# Altium PCB 海关全向控制器图传转接板.PcbDoc
Units mil, origin at the board's own origin, x right, y up, seen from the top; angles counter-clockwise.
Board outline 984.25 x 2362.2 mil, 2 copper layers (Top Layer, Bottom Layer), stack 65.792 mil thick; 11 components, 11 nets, 56 pads, 3 vias.
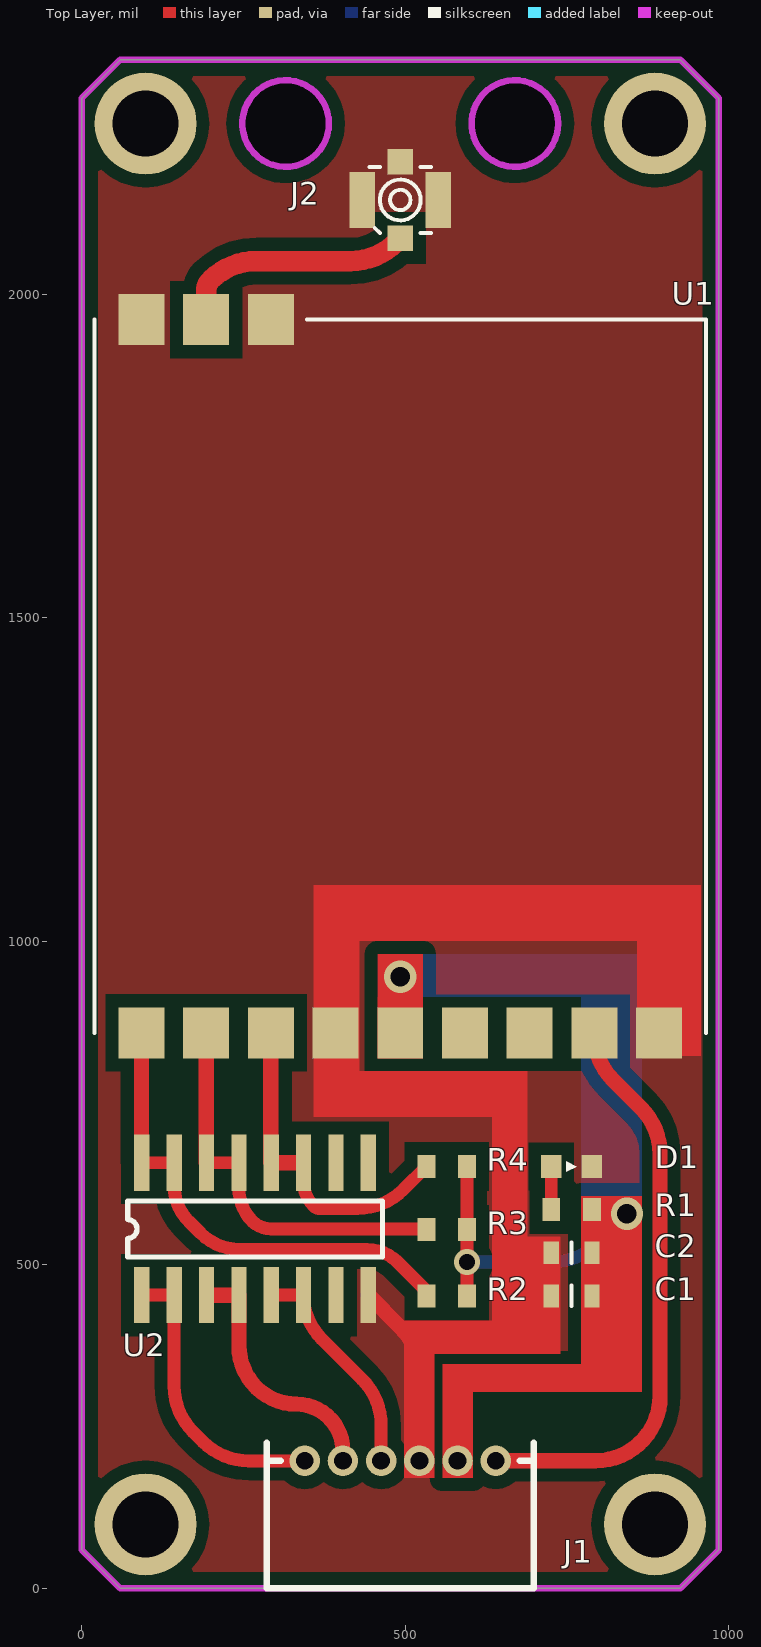
[diagram p0: Top Layer view]
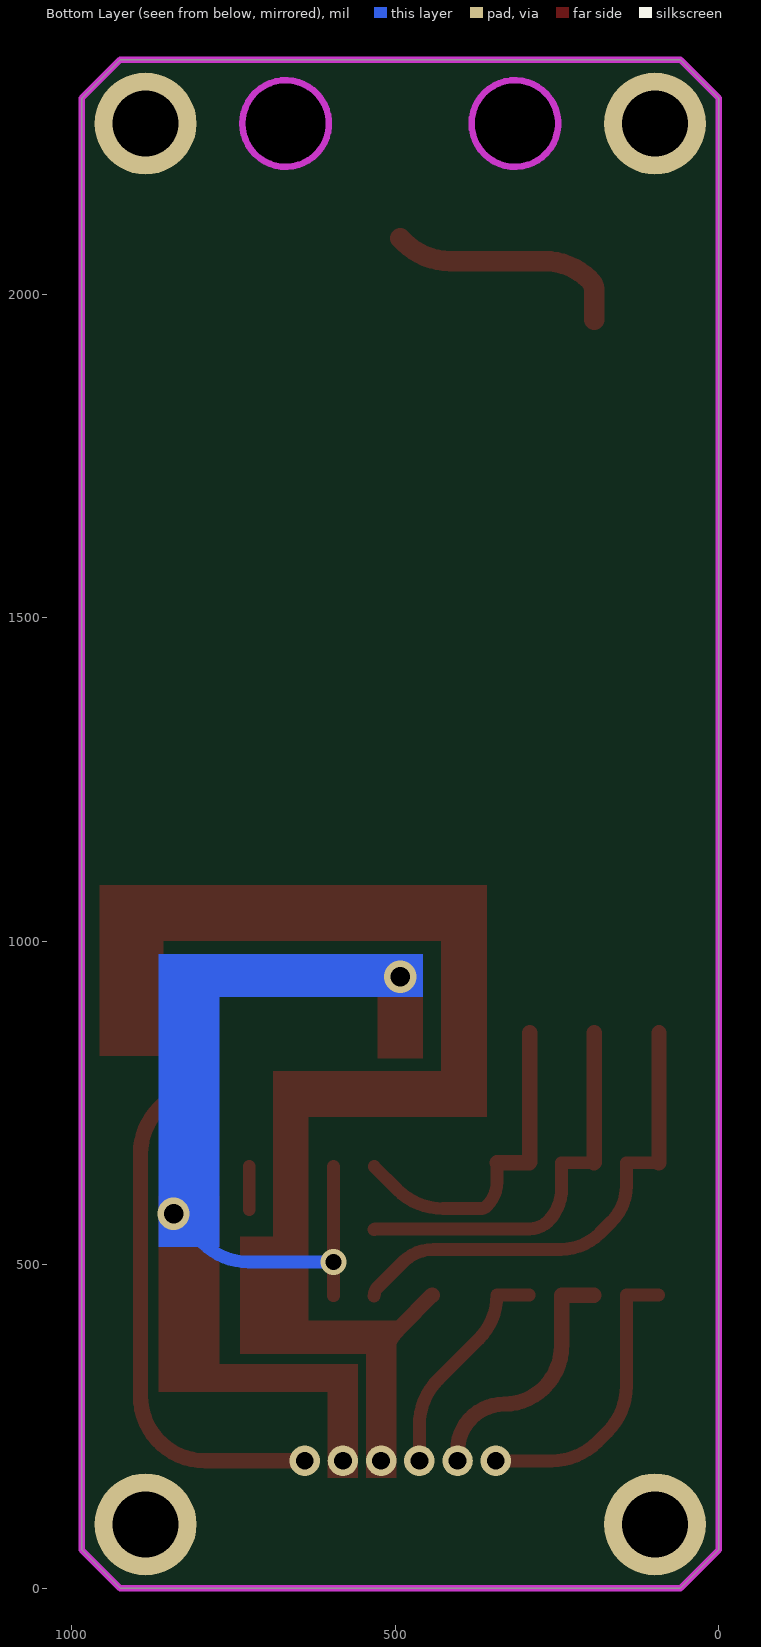
[diagram p1: Bottom Layer view, seen from below]
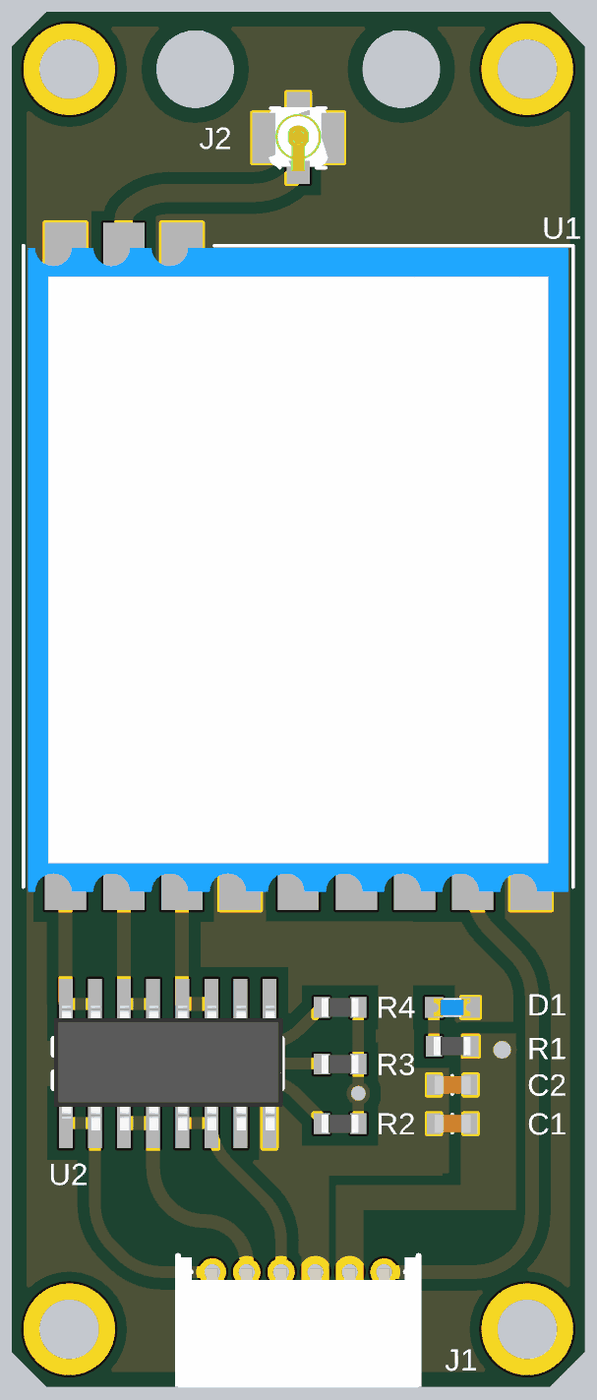
[diagram p2: 3D render of the assembled board from above, using the file's embedded part models]

## Layer stack, top to bottom
Top Solder: solder mask 0.4, Solder Resist, Dk 3.5
Top Layer: signal copper 1.4
Dielectric 1: dielectric 62.9921, FR-4, Dk 4.8
Bottom Layer: signal copper 1.4
Bottom Solder: solder mask 0.4, Solder Resist, Dk 3.5

## Board outline
0,59.05 59.05,0 925.2,0 984.25,59.06 984.25,2303.15 925.2,2362.21 59.06,2362.21 0,2303.15
cut-out: 314.96,2196.85 cw(c314.96,2263.78) 248.03,2263.78 cw(c314.96,2263.78) 314.96,2330.71 cw(c314.96,2263.78) 381.89,2263.78 cw(c314.96,2263.78)
cut-out: 669.29,2196.85 cw(c669.29,2263.78) 602.36,2263.78 cw(c669.29,2263.78) 669.29,2330.71 cw(c669.29,2263.78) 736.22,2263.78 cw(c669.29,2263.78)

## Design rules (kind name [scope] priority, off if disabled: settings)
Clearance [All] p1: gap=6
ComponentClearance [All] p1: gap=0 collisioncheckmode=3 verticalgap=0 showdistances=FALSE
Height [All] p1: minheight=0 maxheight=2000 prefheight=500
HoleSize [All] p1: absolutevalues=TRUE maxlimit=200 minlimit=1 maxpercent=80.000 minpercent=20.000
HoleToHoleClearance [All] p1: gap=6 allowstackedmicrovias=TRUE
MinimumSolderMaskSliver [All] p1: minsoldermaskwidth=0
PlaneConnect [All] p1: planeconnectstyle=Direct reliefexpansion=20 reliefentries=4 reliefconductorwidth=10 reliefairgap=10
PolygonConnect [All] p1: connectstyle=Direct reliefconductorwidth=10 reliefentries=4 polygonreliefangle="90 Angle" airgapwidth=10
RoutingVias [All] p1: holewidth=28 width=50 viastyle="Through Hole" minholewidth=8 minwidth=12 maxholewidth=200 maxwidth=300
SilkToSilkClearance [All] p1: silktosilkclearance=0
SilkToSolderMaskClearance [IsPad] p1: minsilkscreentomaskgap=0 clearancetoexposedcopper=TRUE
SolderMaskExpansion [All] p1: expansion=4
Width [All] p1: maxlimit=157.48 minlimit=10 preferedwidth=10
21 further rules are at their usual default settings.

## Components (designator, comment, footprint, x,y, rotation, side; value= is the part's Value field where it differs from the comment)
C1 "10uF" C0603 756.89,451.77 r0 top
C2 "0.1uF" C0603 756.89,518.37 r0 top
D1 "LED" LED0603 756.89,651.57 r0 top
J1 "Jack 1x6" ZH-6AWD 492.13,196.85 r0 top locked
J2 "ANT-ipex" IPEX 492.13,2145.67 r0 top
R1 "1K" R0603 756.89,584.97 r180 top
R2 "NC" R0603 563.98,451.77 r0 top
R3 "NC" R0603 563.98,554.13 r0 top
R4 "NC" R0603 563.98,651.57 r0 top
U1 "RX5808" RX5808 492.13,1409.45 r270 top
U2 "ULN2003" SO16 267.72,555.12 r90 top

## Footprints (in the part's own frame and the unit in brackets; to place one, negate y for a bottom-side part, rotate by r counter-clockwise, add the part's x,y. Pads: shape width x height; smd on the part's side, far side on the other; paste and mask are expansions set on the pad)
C0603 [mm]
  rect 0.6x0.9 smd: 1(-0.8,0) 2(0.8,0)
  silkscreen extent 0,-0.4 0,0.4, body extent -0.8,-0.4 0.8,0.4, height 0.5
IPEX [mm]
  rect 1x1 smd: 1(0,-1.5) 2(0,1.5)
  rect 1x2.2 smd: 2(-1.5,0) 2(1.5,0)
  silkscreen extent -1.2,-1.3 1.2,1.3, body extent -1.45,-1.45 1.45,1.45, height 0.9
LED0603 [mm]
  rect 0.8x0.9 smd: 1(-0.8,0) 2(0.8,0)
  silkscreen extent -0.2,-0.2 0.2,0.2, body extent -0.8,-0.4 0.8,0.4, height 0.6
R0603 [mm]
  rect 0.7x0.9 smd: 1(-0.8,0) 2(0.8,0)
  body extent -0.8,-0.4 0.8,0.4, height 0.37
RX5808 [mm]
  rect 2x1.8 smd: 1(-14,-10.16) 2(-14,-7.62) 3(-14,-5.08) 4(14,-10.16) 5(14,-7.62) 6(14,-5.08) 7(14,-2.54) 8(14,0) 9(14,2.54) 10(14,5.08) 11(14,7.62) 12(14,10.16)
  silkscreen extent -14,-12 14,12, body extent -13.91,-11.79 14.2,11.79, height 3
SO16 [mm]
  rect 2.2x0.6 smd: 1(-2.6,4.445) 2(-2.6,3.175) 3(-2.6,1.905) 4(-2.6,0.635) 5(-2.6,-0.635) 6(-2.6,-1.905) 7(-2.6,-3.175) 8(-2.6,-4.445) 9(2.6,-4.445) 10(2.6,-3.175) 11(2.6,-1.905) 12(2.6,-0.635) 13(2.6,0.635) 14(2.6,1.905) 15(2.6,3.175) 16(2.6,4.445)
  silkscreen extent -1.1,-5 1.1,5, body extent -2.92,-5.02 3.02,4.95, height 1.35
ZH-6AWD [mm] "1.5mm，6P，卧插"
  round 1.2 hole 0.7: 1(-3.75,0) 2(-2.25,0) 3(-0.75,0) 4(0.75,0) 5(2.25,0) 6(3.75,0)
  silkscreen extent -5.25,-5 5.25,0.7, body extent -5.25,-5.05 5.25,0.65, height 3.95

## Part data
C1 C2: library part "Cap Semi"
J1: "插座"
R1 R2 R3 R4: library part Res, "Resistor"

## Free pads (board coordinates)
  round 157.48 hole 102.36: ""(98.43,2263.78) ""(98.43,98.43) ""(885.83,98.43) ""(885.83,2263.78)

## Via types
v1: diameter 50, hole 30, Top Layer to Bottom Layer, tented both sides, 2 vias
v2: diameter 40, hole 25, Top Layer to Bottom Layer, tented both sides, 1 vias

## Nets (pads, with @x,y where several pads share a name; then routed paths per layer and width w, separated by ;. In a path a pad name is that pad's centre, name@x,y a point inside that pad or via, vN(x,y) a via of type N, cw(c..) or ccw(c..) an arc to the next point about the centre after c; other vN are vias at no path point)
+5V: C1.2 C2.2 J1.5 R1.1 R2.2 R3.2 R4.2 U1.8 | length 473.5
  Top Layer w19.68: R2.2 v2(595.47,503.94) R3.2 R4.2
  Bottom Layer w19.68: v2(595.47,503.94) 726.3,503.94 ccw(c726.3,603.94) 797.01,533.23 v1(842.52,578.74)
  other v1: 492.13,944.88
GND: C1.1 C2.1 D1.2 J1.4 J2.2 U1.1 U1.3 U1.7 U1.12 U2.8 | length 284.3
  Top Layer w23.62: U2.8 492.36,403.11 cw(c421.65,332.4) 521.65,332.4 J1.4
NetD1_1: D1.1 R1.2 | length 66.6
  Top Layer w19.68: R1.2 D1.1
NetJ2_1: J2.1 U1.2 | length 374.4
  Top Layer w31.5: U1.2 192.13,2005.16 cw(c215.79,2005.16) 199.06,2021.89 cw(c269.77,1951.18) 269.77,2051.18 415.27,2051.18 ccw(c415.27,2151.18) 485.98,2080.47 J2.1
NetR2_1: R2.1 U1.4 U2.15 U2.16 | length 759.6
  Top Layer w20: U2.16 U2.15 142.72,621.58 ccw(c220.01,621.58) 165.35,566.93 183.61,548.68 ccw(c244.09,609.17) 244.09,523.62 440.67,523.62 cw(c440.67,456.41) 488.19,503.94 526.91,465.21 cw(c513.47,451.77) R2.1
  Top Layer w23.62: U1.4 92.13,658.91 ccw(c94.14,658.91) U2.16
NetR3_1: R3.1 U1.5 U2.13 U2.14 | length 619.2
  Top Layer w20: U2.14 U2.13 242.72,617.78 ccw(c314.63,617.78) 263.78,566.93 ccw(c292.29,595.44) 292.29,555.12 530.1,555.12 cw(c530.1,551.76) R3.1
  Top Layer w23.62: U1.5 192.13,658.91 ccw(c194.14,658.91) U2.14
NetR4_1: R4.1 U1.6 U2.11 U2.12 | length 519.9
  Top Layer w19.68: U2.11 342.72,628.1 ccw(c395.81,628.1) 358.27,590.55 ccw(c367.77,600.06) 367.77,586.61 426.1,586.61 ccw(c426.1,686.61) 496.81,615.9 R4.1
  Top Layer w23.62: U1.6 292.13,658.91 ccw(c294.14,658.91) U2.12 U2.11
VEDIO: J1.6 U1.11 | length 905.9
  Top Layer w23.62: J1.6 793.7,196.85 ccw(c793.7,296.85) 893.7,296.85 893.7,671.18 ccw(c793.7,671.18) 864.41,741.89 821.42,784.88 cw(c892.13,855.59) 792.13,855.59 U1.11
VEDIO_CH1: J1.1 U2.1 U2.2 | length 455.8
  Top Layer w20: U2.1 U2.2 142.72,312.09 ccw(c242.72,312.09) 172.01,241.38 187.25,226.14 ccw(c257.96,296.85) 257.96,196.85 J1.1
VEDIO_CH2: J1.2 U2.3 U2.4 | length 397.3
  Top Layer w23.62: U2.3 U2.4 242.72,375.15 ccw(c334.79,375.15) 269.68,310.04 ccw(c331.47,371.82) 331.47,284.45 cw(c331.47,212.37) 403.54,212.37 J1.2
VEDIO_CH3: J1.3 U2.5 U2.6 | length 347.1
  Top Layer w20: U2.5 U2.6 ccw(c438.24,452.76) 370.69,385.21 433.31,322.6 cw(c362.6,251.89) 462.6,251.89 J1.3
pads on no net: U1.9 U1.10 U2.7 U2.9 U2.10

## Polygon pours and split planes (outlines as drawn)
GND on Top Layer "Keep-Out Layer-No Net" (solid, remove dead copper, pour order 3): 0,2362.2 984.25,2362.2 984.25,0 0,0

## Keep-outs
Keep-Out Layer:
  circle w10: c314.96,2263.78 r66.93
  circle w10: c669.29,2263.78 r66.93
  lines w10: 0,59.05 0,2303.15 59.06,2362.21 925.2,2362.21 984.25,2303.15 984.25,59.06 925.2,0 59.05,0 0,59.05

## Other copper
Top Layer:
  rectangle net +5V: 557.09,170.28 604.33,346.46
  rectangle net GND: 498.03,170.28 545.28,409.45
  rectangle net GND: 499.02,362.2 740.16,413.39
  rectangle net GND: 669.29,362.2 740.16,543.31
  rectangle net +5V: 557.09,303.15 822.83,346.46
  rectangle net +5V: 771.65,303.15 866.14,606.3
  rectangle net +5V: 456.69,818.9 527.56,980.31
  rectangle net GND: 633.86,389.76 688.98,744.09
  rectangle net GND: 358.27,728.35 429.13,1086.61
  rectangle net GND: 358.27,728.35 688.98,799.21
  rectangle net GND: 358.27,1000 956.69,1086.61
  rectangle net GND: 858.27,822.83 956.69,1086.61
Bottom Layer:
  rectangle net +5V: 771.65,527.56 866.14,968.5
  rectangle net +5V: 456.69,913.39 866.14,980.31